# Altium PCB PCB.PcbDoc
Units mm, origin at the board's own origin, x right, y up, seen from the top; angles counter-clockwise.
Board outline 92 x 75 mm, 2 copper layers (Top Layer, Bottom Layer); 31 components, 13 nets, 70 pads, 0 vias.
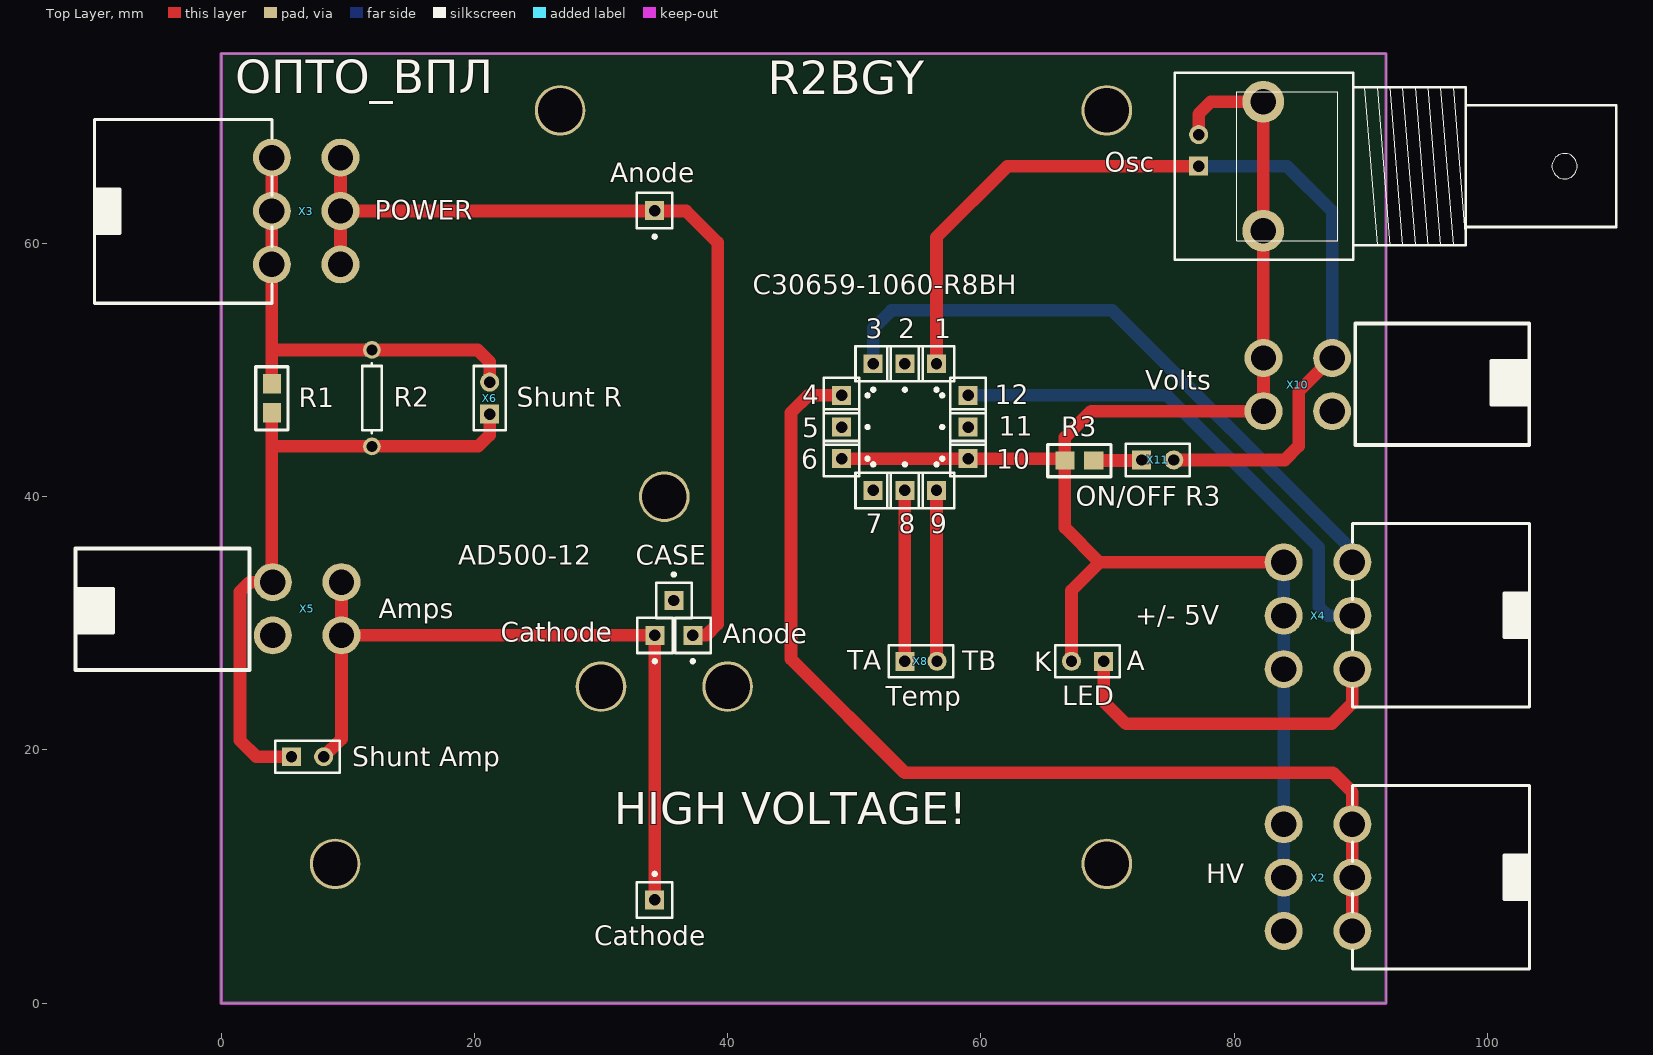
[diagram p0: Top Layer view]
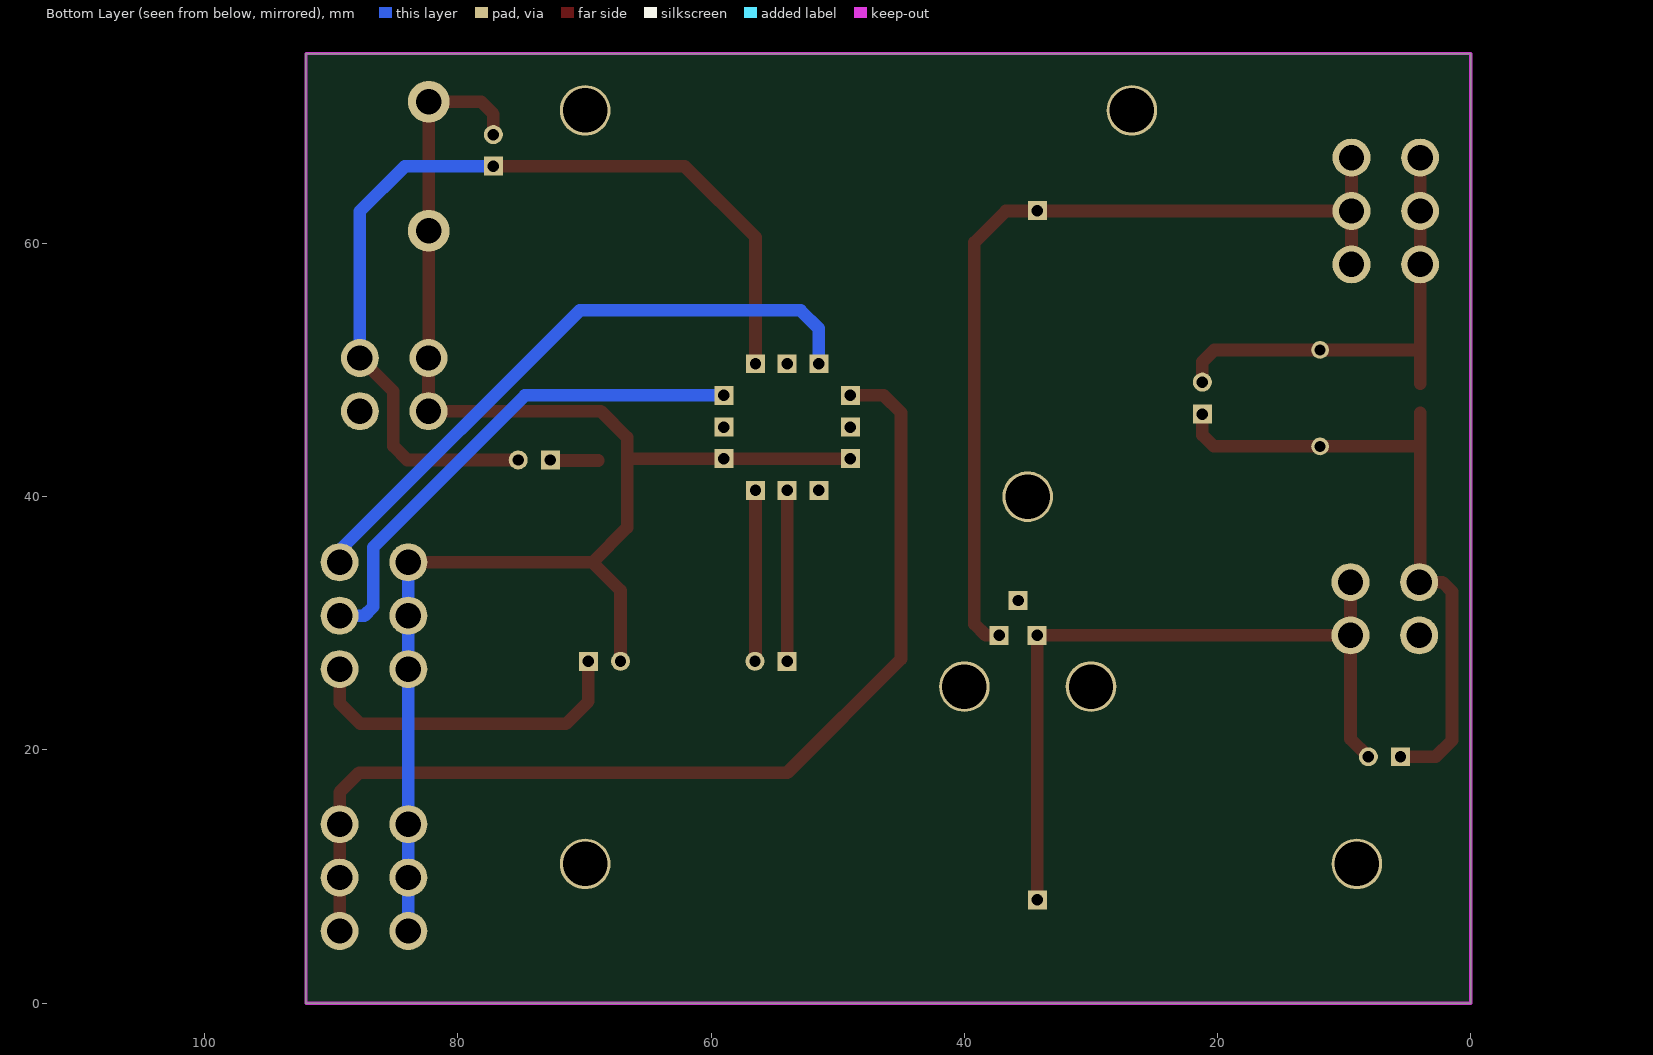
[diagram p1: Bottom Layer view, seen from below]

## Layer stack, top to bottom
Top Solder: solder mask 0.0102, Solder Resist, Dk 3.5
Top Layer: signal copper 0.0356
Dielectric 1: dielectric 0.32, FR-4, Dk 4.8
Bottom Layer: signal copper 0.0356
Bottom Solder: solder mask 0.0102, Solder Resist, Dk 3.5

## Board outline
0,0 92,0 92,75 0,75

## Design rules (kind name [scope] priority, off if disabled: settings)
Clearance [All] p1: gap=0.254
PolygonConnect [All] p1: connectstyle=Relief reliefconductorwidth=0.254 reliefentries=4 polygonreliefangle="90 Angle" airgapwidth=0.254
RoutingVias [All] p1: holewidth=0.711 width=1.27 viastyle="Through Hole" minholewidth=0.711 minwidth=1.27 maxholewidth=0.711 maxwidth=1.27
SolderMaskExpansion [All] p1: expansion=0.102
Width [All] p1: maxlimit=2.254 minlimit=0.254 preferedwidth=0.254
29 further rules are at their usual default settings.

## Classes and differential pairs
component class Sheet1: 1 2 3 4 5 6 7 8 9 10 11 12 Anode CASE Cathode LED Osc R1 R2 R3 "Shunt Amp" X2 X3 X4 X5 X6 X8 X10 X11

## Components (designator, comment, footprint, x,y, rotation, side; value= is the part's Value field where it differs from the comment)
1 "OUTPUT" PIN1 56.5,50.5 r180 top
2 "NC" PIN1 54,50.5 r180 top
3 "-5V" PIN1 51.5,50.5 r180 top
4 "HV" PIN1 49,48 r270 top
5 "NC" PIN1 49,45.5 r270 top
6 "CASE" PIN1 49,43 r270 top
7 "NC" PIN1 51.5,40.5 r0 top
8 "TA" PIN1 54,40.5 r0 top
9 "TB" PIN1 56.5,40.5 r0 top
10 "GND" PIN1 59,43 r90 top
11 "NC" PIN1 59,45.5 r90 top
12 "+5V" PIN1 59,48 r90 top
Anode "Socket" PIN1 37.25,29.055 r180 top (schematic designator A_1)
Anode "Socket" PIN1 34.239,62.589 r180 top (schematic designator A_PROBE)
CASE "Socket" PIN1 35.75,31.805 r0 top (schematic designator CASE_1)
Cathode "Socket" PIN1 34.25,29.055 r180 top (schematic designator K_1)
Cathode "Socket" PIN1 34.239,8.158 r0 top (schematic designator K_PROBE)
LED "Header 2" HDR1X2 69.698,27 r180 top
Osc "BNC" "BNC_RA CON" 77.2,66.1 r180 top (schematic designator X7)
R1 "10M" RES 5.25,50.25 r180 top
R2 "Res1" AXIAL-0.3 11.906,47.782 r270 top
R3 "50" RES 65.3,44.1 r270 top
"Shunt Amp" "Header 2" HDR1X2 5.556,19.461 r0 top (schematic designator X1)
X2 "HV" POWER 89.343,5.7 r270 top
X3 "POWER" POWER 4.007,66.782 r90 top
X4 "+/- 5V" POWER 89.343,26.383 r270 top
X5 "Amps" AMP_VOLTMETER 9.5,33.25 r270 top
X6 "Shunt R" HDR1X2 21.203,46.512 r90 top
X8 "Temp" HDR1X2 54,27 r0 top
X10 "Volts" AMP_VOLTMETER 82.32,46.751 r90 top
X11 "ON/OFF R3" HDR1X2 72.7,42.9 r0 top

## Footprints (in the part's own frame and the unit in brackets; to place one, negate y for a bottom-side part, rotate by r counter-clockwise, add the part's x,y. Pads: shape width x height; smd on the part's side, far side on the other; paste and mask are expansions set on the pad)
AMP_VOLTMETER [mm] "AMP_VOLTMETER"
  round 3 hole 2: 1(0,0) 2(0,-5.423) 3(4.2,-5.423) 4(4.2,0)
  silkscreen extent -2.66,-21 6.94,-7.25
AXIAL-0.3 [mm] "Axial Device, Thru-Hole; 2 Leads; 0.3 in Pin Spacing"
  round 1.4 hole 0.85: 1(-3.81,0) 2(3.81,0)
  silkscreen extent -2.77,-0.76 2.77,0.76
"BNC_RA CON" [mm] "Connector; BNC Elbow"
  rect 1.5x1.5 hole 0.9: 1(0,0)
  round 3.3 hole 2: 2(-5.1,5.1) 2(-5.1,-5.1)
  round 1.5 hole 0.9: 2(0,-2.5)
  silkscreen extent -33,-7.4 1.9,7.4
HDR1X2 [mm] "Connector; Header; 2 Position"
  rect 1.5x1.5 hole 0.9: 1(0,0)
  round 1.5 hole 0.9: 2(2.54,0)
  silkscreen extent -1.27,-1.27 3.81,1.27
PIN1 [mm] "Connector; Plug"
  rect 1.5x1.5 hole 0.9: 1(0,0)
  silkscreen extent -1.4,-1.4 1.4,2.17
POWER [mm] "POWER"
  round 3 hole 2: 1(0,0) 2(-4.217,0) 3(-8.435,0) 4(0,-5.422) 5(-4.217,-5.422) 6(-8.435,-5.422)
  silkscreen extent -11.5,0 3,14
RES [mil] "FROM_MAX"
  rect 55.98x60 smd: 1(49,52.71) 2(49,142.71)
  silkscreen extent -1,0 99,196, body extent 17,19 81,177, height 100

## Part data
1 2 3 4 5 6 7 8 9 10 11 12: library part Socket, "Socket"
LED "Shunt Amp": "Header, 2-Pin"
Osc: "BNC Elbow Connector"
R1 R3: library part RES
R2: "Resistor"
X2 X4: library part POWER
X5 X10: library part AMP_VOLTMETER
X6 X8 X11: library part "Header 2", "Header, 2-Pin"

## Free pads (board coordinates)
  round 4 hole 3.5: 0(9,11) 0(26.772,70.51) 0(30,25) 0(35,40) 0(40,25) 0(69.952,10.998) 0(69.952,70.51)

## Nets (pads, with @x,y where several pads share a name; then routed paths per layer and width w, separated by ;. In a path a pad name is that pad's centre, name@x,y a point inside that pad or via, vN(x,y) a via of type N, cw(c..) or ccw(c..) an arc to the next point about the centre after c; other vN are vias at no path point)
GND: 6.1 10.1 LED.2 Osc.2 R3.1 X2.4 X2.5 X2.6 X4.4 X4.5 X4.6 X10.1 X10.4 | length 129.2
  Top Layer w1: 6.1 10.1 66.494,43 R3.1 ; LED.2 67.158,32.593 69.382,34.818 ; Osc.2@77.2,68.6 77.2,70.219 78.181,71.2 82.3,71.2 82.3,61 82.3,50.97 X10.4 X10.1 68.712,46.751 66.639,44.677 R3.1 ; X4.6 69.382,34.818 ; R3.1 66.639,37.561 69.382,34.818
  Bottom Layer w1: X2.4 X2.5 X2.6 X4.4 X4.5 X4.6
LED: LED.1 X4.1 | length 26.9
  Top Layer w1: LED.1 69.698,23.835 71.476,22.057 87.706,22.057 89.343,23.693 X4.1
Net1_1: 1.1 Osc.1 X10.3 X11.2 | length 75
  Top Layer w1: 1.1 56.5,60.5 62.1,66.1 Osc.1 ; X11.2 84,42.9 85.1,44 85.1,48.308 X10.3
  Bottom Layer w1: Osc.1 84.196,66.1 87.743,62.553 87.743,53.694 X10.3
Net3_1: 3.1 X4.3 | length 50
  Bottom Layer w1: 3.1 51.5,53.287 52.934,54.721 70.379,54.721 89.343,35.757 X4.3
Net4_1: 4.1 X2.1 X2.2 X2.3 | length 83.7
  Top Layer w1: 4.1 46.365,48 45,46.635 45,27.187 53.987,18.2 87.8,18.2 89.343,16.657 X2.3 X2.2 X2.1
Net8_1: 8.1 X8.1 | length 13.5
  Top Layer w1: X8.1 8.1
Net9_1: 9.1 X8.2 | length 13.5
  Top Layer w1: 9.1 56.5,27.04 X8.2
Net12_1: 12.1 X4.2 | length 40.3
  Bottom Layer w1: 12.1 74.7,48 86.7,36 86.7,31.3 87.4,30.6 X4.2
NetA_1_1: Anode.1 X3.4 X3.5 X3.6 | length 71.7
  Top Layer w1: X3.6 X3.5 ; X3.4 X3.5 ; Anode.1@37.25,29.055 38.314,29.055 39.211,29.952 39.211,60.081 36.727,62.565 23.997,62.565 23.996,62.564 X3.5
NetK_1_1: "Shunt Amp.2" Cathode.1 X5.1 X5.4 | length 60
  Top Layer w1: 8.096,19.461 9.5,20.865 X5.4 ; X5.1 X5.4 ; Cathode.1@34.233,8.158 34.25,8.176 34.25,29.055 34.245,29.05 X5.4
NetR1_1: R1.1 R2.1 X3.1 X3.2 X3.3 X6.2 | length 37.1
  Top Layer w1: R1.1 4.005,51.694 ; X3.1 4.005,66.78 4.005,51.694 ; X6.2 21.203,50.658 20.268,51.592 R2.1 4.107,51.592 4.005,51.694
NetR1_2: "Shunt Amp.1" R1.2 R2.2 X5.2 X6.1 | length 51.9
  Top Layer w1: R1.2 4.005,43.947 ; 5.556,19.461 2.788,19.461 1.492,20.757 1.492,32.492 2.25,33.25 X5.2 4.005,33.322 4.005,43.947 ; X6.1 21.203,44.879 20.296,43.972 R2.2 4.031,43.972 4.005,43.947
NetR3_2: R3.2 X11.1 | length 3.8
  Top Layer w1: R3.2 72.655,42.855 X11.1
pads on no net: 2.1 5.1 7.1 11.1 CASE.1 X5.3 X10.2

## Keep-outs
Keep-Out Layer:
  the board outline again, w0.254

## Silkscreen, mask and mechanical layers (free items; w line width, h text height)
Top Overlay:
  text "ОПТО_ВПЛ" at 1.113,71 h4.52
  text "R2BGY" at 43.155,70.921 h4.52
  text "C30659-1060-R8BH" at 42,56 h1.52
  text "AD500-12" at 18.72,34.62 h1.52
  text "TA" at 49.454,26.324 h1.52
  text "TB" at 58.547,26.298 h1.52
  text "A" at 71.526,26.298 h1.52
  text "K" at 64.211,26.222 h1.52
  text "HIGH VOLTAGE!" at 31.064,14.148 h2.52